# EAGLE board LedPanelV1 (EAGLE 6.5.0)
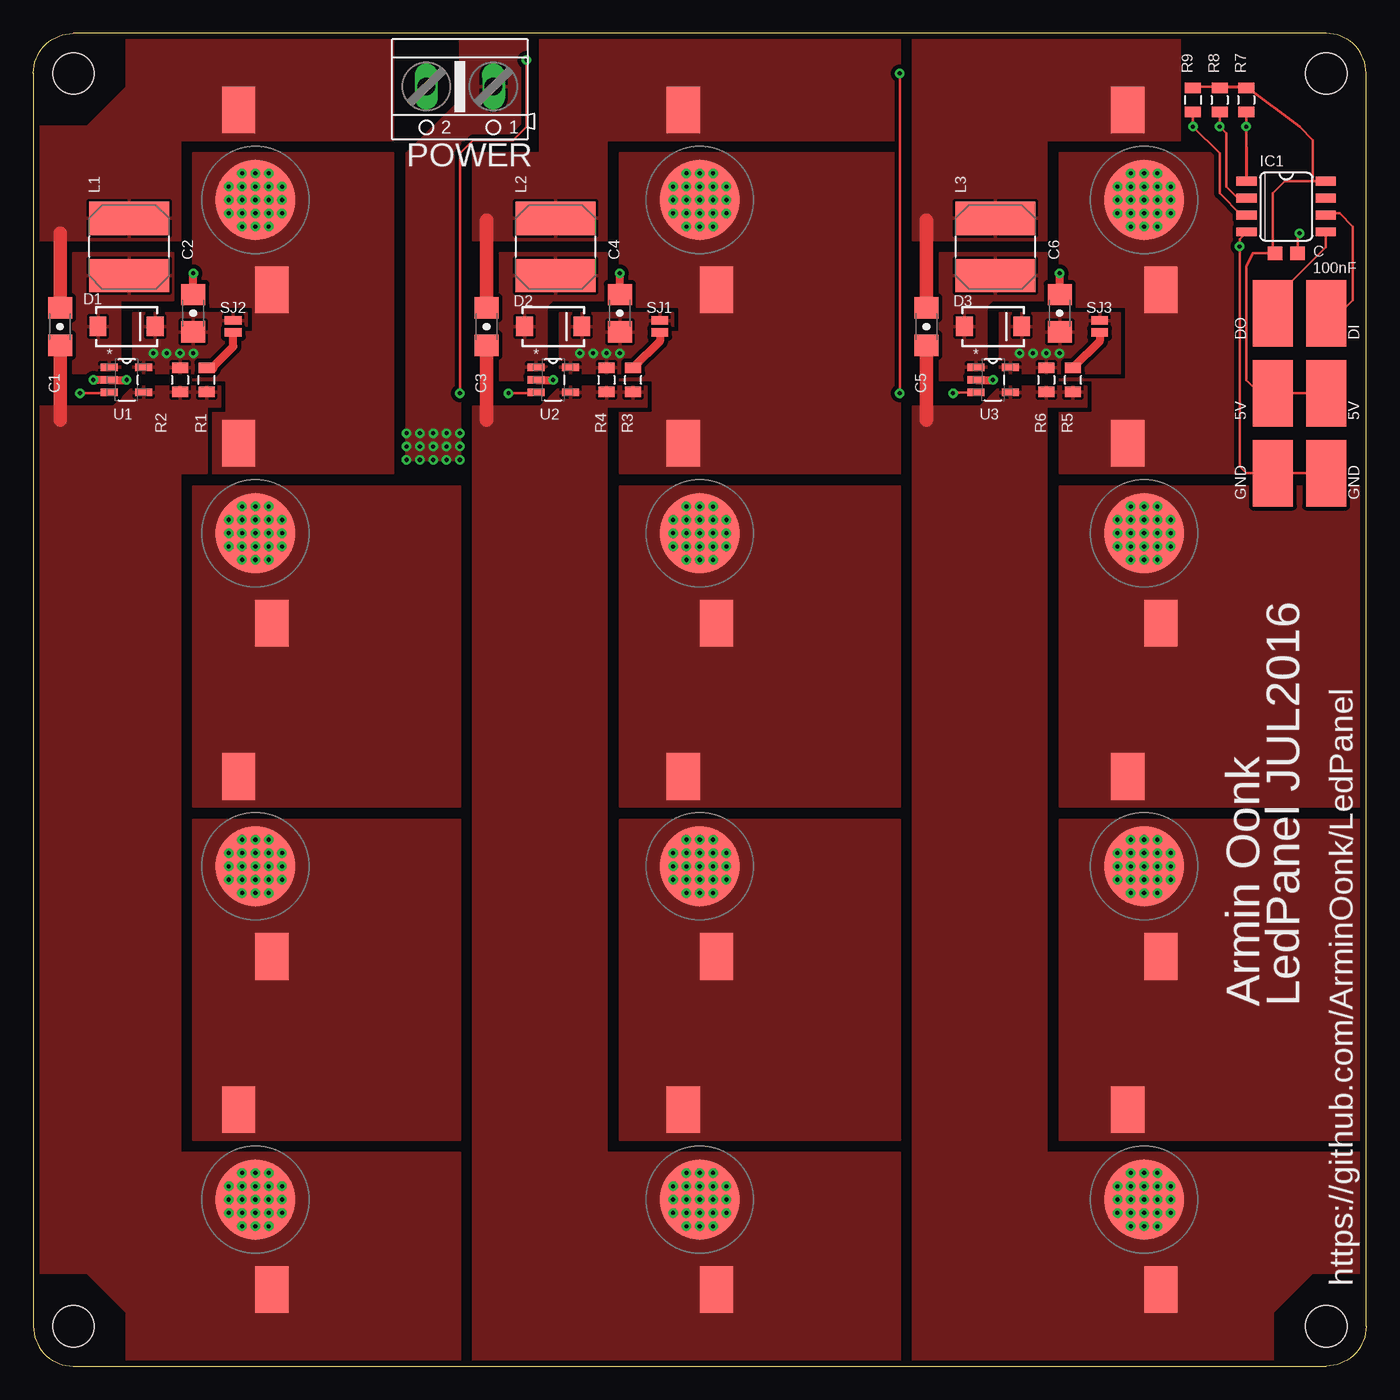
[diagram p0: board, top side]
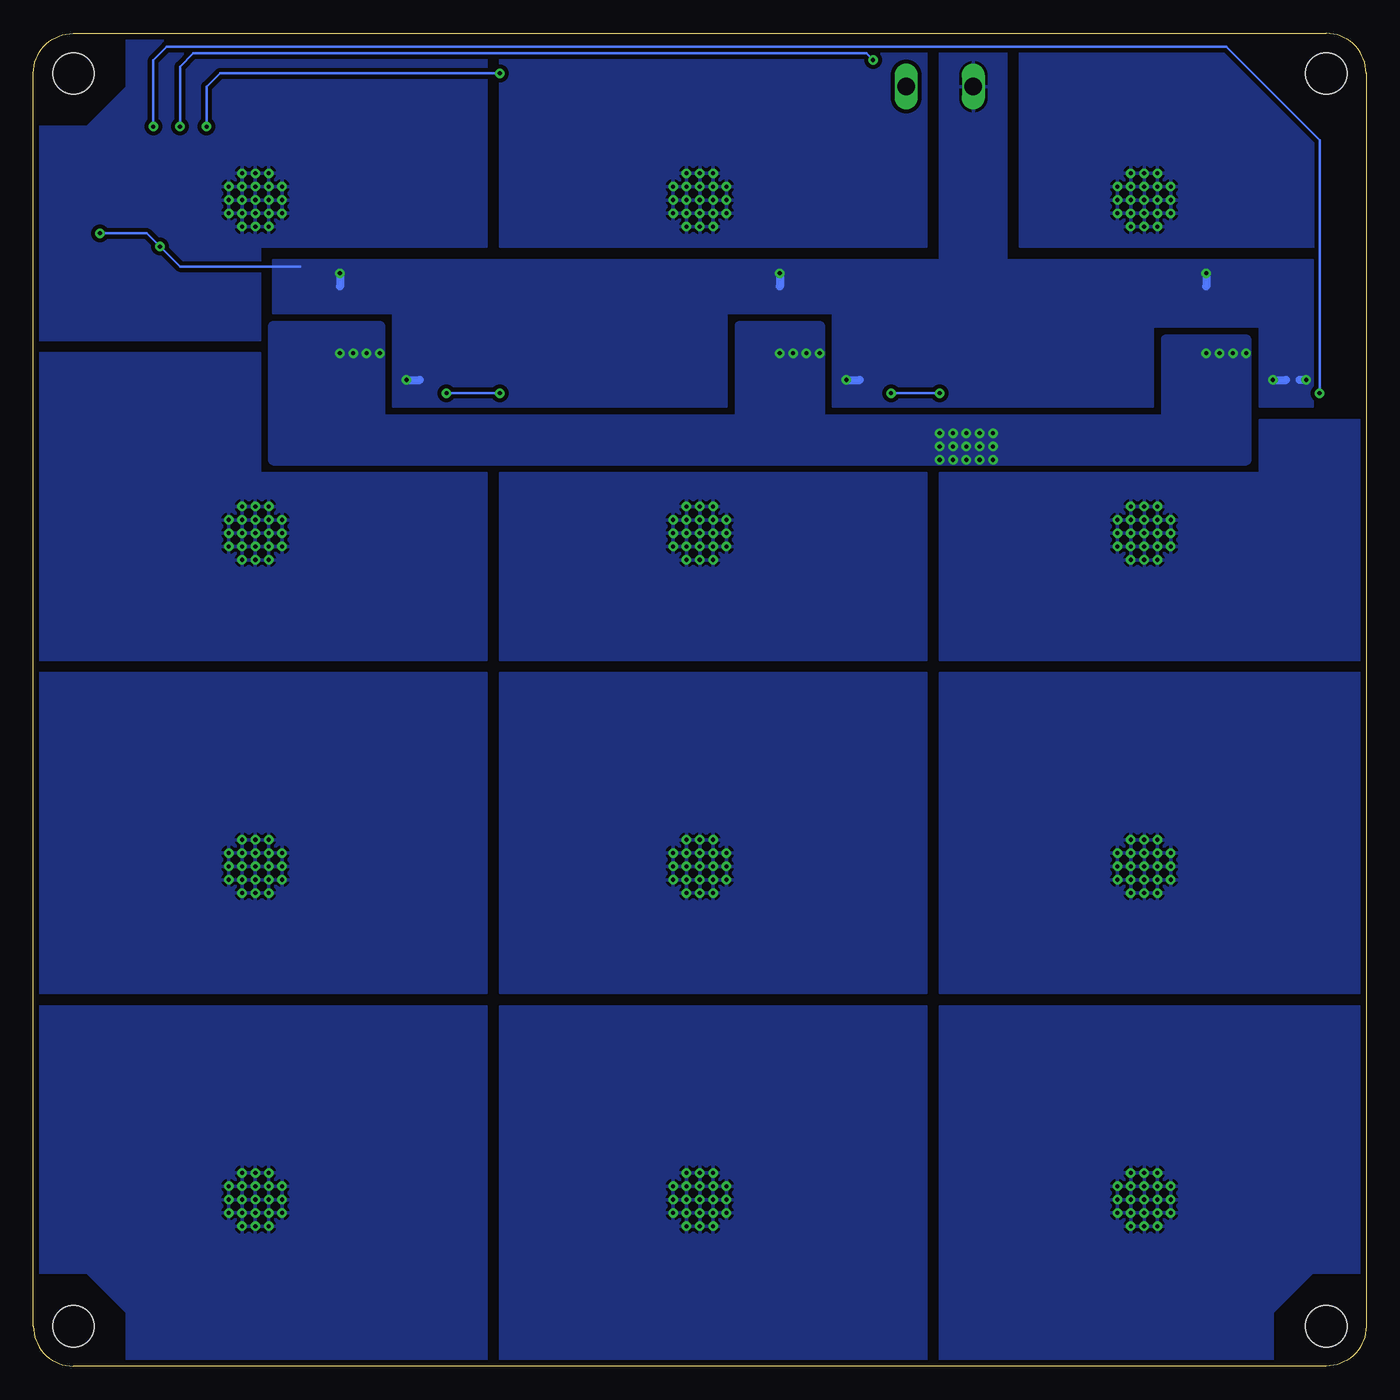
[diagram p1: board, bottom side, seen from below]

Size 100 x 100 mm. Coordinates in mm from the lower left corner, seen from the top.
Outline: 3,0 97,0 arc90 100,3 100,97 arc90 97,100 3,100 arc90 0,97 0,3 arc90 3,0
Copper layers (1*16): Top 0.018mm / dielectric 1.55mm / Bottom 0.018mm
Design rules "eC-PCB_proto-2-layer": minimum track width 0.15mm, minimum drill 0.25mm, track to track 0.15mm, track to pad 0.15mm, pad to pad 0.15mm, via to via 0.15mm, smd to smd 0.15mm, copper to edge 0.45mm, drill to drill 0.3mm, minimum pad ring 0.2mm, minimum via ring 0.2mm, stop-mask expansion 0.1mm, vias tented up to drill 0mil, thermal gap 0.2mm
Net classes: 0 default: width 0.152 mm, drill 0.305 mm, clearance 0.152 mm; 1 power: width 0.152 mm, drill 0.305 mm, clearance 0.152 mm
Holes 3.1 mm at 3,97 97,97 3,3 97,3

## Footprints (pad centres in the part's own frame; a part is rotated, then mirrored left to right if it is on the bottom)
SOLDER_PAD = smd 3 x 5: 1 0,0
1206-CAP = smd 1.6 x 1.8: 1 -1.4,0; 2 1.4,0
SMA-DIODE = smd 1.27 x 1.47: A -2.15,0; C 2.15,0
SO08-SKINNYPADS = smd 0.66 x 1.524: 1 -1.905,-2.973; 2 -0.635,-2.973; 3 0.635,-2.973; 4 1.905,-2.973; 5 1.905,2.973; 6 0.635,2.973; 7 -0.635,2.973; 8 -1.905,2.973 | smd 1 x 1.1: +5V 3.5,-0.85; GND 3.5,0.85
SRN6045 = smd 2.5 x 6: 1 -2.175,-0.175; 2 2.125,-0.175
AK500/2 = drill 1.321 long: 1 -2.515,0; 2 2.515,0
0805 = smd 0.8 x 1.2: 1 -0.9,0; 2 0.9,0
PAD-JUMPER-2-NO_NO_SILK = smd 0.635 x 1.27: 1 -0.45,0; 2 0.45,0
SOT95P280X130-5N = smd 1.27 x 0.559: 1 -1.295,0.94; 2 -1.295,0; 3 -1.295,-0.94; 4 1.295,-0.94; 5 1.295,0.94
LED_3W = smd 3.5 x 2.5: ANODE 6.75,1.25; CATHODE -6.75,-1.25 | drill 0.31: P$1 -2,-1; P$2 -1,-1; P$3 0,-1; P$4 1,-1; P$5 2,-1; P$6 2,0; P$7 1,0; P$8 0,0; P$9 -1,0; P$10 -2,0; P$11 -2,1; P$12 -1,1; P$13 0,1; P$14 1,1; P$15 2,1; P$16 -1,2; P$17 0,2; P$18 1,2; P$19 -1,-2; P$20 0,-2; P$21 1,-2 | smd 6 x 6: SLUG 0,0

## Placement (x,y rotation side)
5V  5V  [SOLDER_PAD]  97,73 0 top
C1  1uF  [1206-CAP]  2,78 90 top
C2  2.2uF  [1206-CAP]  12,79 90 top
C3  1uF  [1206-CAP]  34,78 90 top
C4  2.2uF  [1206-CAP]  44,79 90 top
C5  1uF  [1206-CAP]  67,78 90 top
C6  2.2uF  [1206-CAP]  77,79 90 top
D1  MBRA140  [SMA-DIODE]  7,78 0 top
D2  MBRA140  [SMA-DIODE]  39,78 0 top
D3  MBRA140  [SMA-DIODE]  72,78 0 top
DI  DI  [SOLDER_PAD]  97,79 0 top
DO  DO  [SOLDER_PAD]  93,79 0 top
IC1  WS2811-SOP8  [SO08-SKINNYPADS]  94,87 270 top
L1  33uH  [SRN6045]  7,84 90 top
L2  33uH  [SRN6045]  39,84 90 top
L3  33uH  [SRN6045]  72,84 90 top
POWER  [AK500/2]  32,96 180 top
R1  0.3R  [0805]  13,74 90 top
R2  0.3R  [0805]  11,74 270 top
R3  0.3R  [0805]  45,74 90 top
R4  0.3R  [0805]  43,74 270 top
R5  0.3R  [0805]  78,74 90 top
R6  0.3R  [0805]  76,74 270 top
R7  4.7k  [0805]  91,95 270 top
R8  4.7k  [0805]  89,95 270 top
R9  4.7k  [0805]  87,95 270 top
SJ1  NO Jumper  [PAD-JUMPER-2-NO_NO_SILK]  47,78 270 top
SJ2  NO Jumper  [PAD-JUMPER-2-NO_NO_SILK]  15,78 270 top
SJ3  NO Jumper  [PAD-JUMPER-2-NO_NO_SILK]  80,78 270 top
U1  AL8805W5-7  [SOT95P280X130-5N]  7,74 0 top
U2  AL8805W5-7  [SOT95P280X130-5N]  39,74 0 top
U3  AL8805W5-7  [SOT95P280X130-5N]  72,74 0 top
U$1  LED_3W  [LED_3W]  16.66,12.5 270 top
U$2  LED_3W  [LED_3W]  16.66,37.5 270 top
U$3  LED_3W  [LED_3W]  16.66,62.5 270 top
U$4  LED_3W  [LED_3W]  16.66,87.5 270 top
U$5  LED_3W  [LED_3W]  50,12.5 270 top
U$6  LED_3W  [LED_3W]  50,37.5 270 top
U$7  LED_3W  [LED_3W]  50,62.5 270 top
U$8  LED_3W  [LED_3W]  50,87.5 270 top
U$9  LED_3W  [LED_3W]  83.34,12.5 270 top
U$10  LED_3W  [LED_3W]  83.34,37.5 270 top
U$11  LED_3W  [LED_3W]  83.34,62.5 270 top
U$12  LED_3W  [LED_3W]  83.34,87.5 270 top
U$15  GND  [SOLDER_PAD]  97,67 0 top
U$16  5V  [SOLDER_PAD]  93,73 0 top
U$18  GND  [SOLDER_PAD]  93,67 0 top

## Library data of the parts
5V DI DO IC1 U$1-U$12 U$15 U$16 U$18 = LedPanel
C1-C6 = SparkFun-Capacitors
D1-D3 = SparkFun-DiscreteSemi; PROD_ID: DIO-08053
L1-L3 = SparkFun-Passives; PROD_ID: NDUC-11627
POWER = LedPanel; OC_FARNELL: unknown; OC_NEWARK: unknown
R1-R9 = SparkFun-Resistors; PROD_ID: RES-11622
SJ1-SJ3 = SparkFun-Passives
U1-U3 = LedPanel; MPN: AL8805W5-7; OC_FARNELL: 1904023; OC_NEWARK: 55T1754; PACKAGE: SOT-23-5; SUPPLIER: DIODES INC.

## Nets
5V: 5V.1 IC1.8 IC1.+5V R7.1 R8.1 R9.1 U$16.1
CTRL1: IC1.1 R7.2 U1.3
CTRL2: IC1.2 R8.2 U2.3
CTRL3: IC1.3 R9.2 U3.3
GND: C2.2 C4.2 C6.2 IC1.4 IC1.GND POWER.2 U1.2 U2.2 U3.2 U$15.1 U$18.1
LED1_OUT+: C1.1 R1.1 R2.2 U1.4 U$1.ANODE U$1.P$1 U$1.P$2 U$1.P$3 U$1.P$4 U$1.P$5 U$1.P$6 U$1.P$7 U$1.P$8 U$1.P$9 U$1.P$10 U$1.P$11 U$1.P$12 U$1.P$13 U$1.P$14 U$1.P$15 U$1.P$16 U$1.P$17 U$1.P$18 U$1.P$19 U$1.P$20 U$1.P$21 U$1.SLUG
LED1_OUT- [power]: C1.2 L1.2 U$4.CATHODE
LED2_OUT+: C3.1 R3.1 R4.2 U2.4 U$5.ANODE U$5.P$1 U$5.P$2 U$5.P$3 U$5.P$4 U$5.P$5 U$5.P$6 U$5.P$7 U$5.P$8 U$5.P$9 U$5.P$10 U$5.P$11 U$5.P$12 U$5.P$13 U$5.P$14 U$5.P$15 U$5.P$16 U$5.P$17 U$5.P$18 U$5.P$19 U$5.P$20 U$5.P$21 U$5.SLUG
LED2_OUT- [power]: C3.2 L2.2 U$8.CATHODE
LED3_OUT+: C5.1 R5.1 R6.2 U3.4 U$9.ANODE U$9.P$1 U$9.P$2 U$9.P$3 U$9.P$4 U$9.P$5 U$9.P$6 U$9.P$7 U$9.P$8 U$9.P$9 U$9.P$10 U$9.P$11 U$9.P$12 U$9.P$13 U$9.P$14 U$9.P$15 U$9.P$16 U$9.P$17 U$9.P$18 U$9.P$19 U$9.P$20 U$9.P$21 U$9.SLUG
LED3_OUT- [power]: C5.2 L3.2 U$12.CATHODE
N$1: U$3.CATHODE U$4.ANODE U$4.P$1 U$4.P$2 U$4.P$3 U$4.P$4 U$4.P$5 U$4.P$6 U$4.P$7 U$4.P$8 U$4.P$9 U$4.P$10 U$4.P$11 U$4.P$12 U$4.P$13 U$4.P$14 U$4.P$15 U$4.P$16 U$4.P$17 U$4.P$18 U$4.P$19 U$4.P$20 U$4.P$21 U$4.SLUG
N$2: U$2.CATHODE U$3.ANODE U$3.P$1 U$3.P$2 U$3.P$3 U$3.P$4 U$3.P$5 U$3.P$6 U$3.P$7 U$3.P$8 U$3.P$9 U$3.P$10 U$3.P$11 U$3.P$12 U$3.P$13 U$3.P$14 U$3.P$15 U$3.P$16 U$3.P$17 U$3.P$18 U$3.P$19 U$3.P$20 U$3.P$21 U$3.SLUG
N$3: U$1.CATHODE U$2.ANODE U$2.P$1 U$2.P$2 U$2.P$3 U$2.P$4 U$2.P$5 U$2.P$6 U$2.P$7 U$2.P$8 U$2.P$9 U$2.P$10 U$2.P$11 U$2.P$12 U$2.P$13 U$2.P$14 U$2.P$15 U$2.P$16 U$2.P$17 U$2.P$18 U$2.P$19 U$2.P$20 U$2.P$21 U$2.SLUG
N$4: U$7.CATHODE U$8.ANODE U$8.P$1 U$8.P$2 U$8.P$3 U$8.P$4 U$8.P$5 U$8.P$6 U$8.P$7 U$8.P$8 U$8.P$9 U$8.P$10 U$8.P$11 U$8.P$12 U$8.P$13 U$8.P$14 U$8.P$15 U$8.P$16 U$8.P$17 U$8.P$18 U$8.P$19 U$8.P$20 U$8.P$21 U$8.SLUG
N$5: U$6.CATHODE U$7.ANODE U$7.P$1 U$7.P$2 U$7.P$3 U$7.P$4 U$7.P$5 U$7.P$6 U$7.P$7 U$7.P$8 U$7.P$9 U$7.P$10 U$7.P$11 U$7.P$12 U$7.P$13 U$7.P$14 U$7.P$15 U$7.P$16 U$7.P$17 U$7.P$18 U$7.P$19 U$7.P$20 U$7.P$21 U$7.SLUG
N$6: R1.2 SJ2.2
N$7: U$5.CATHODE U$6.ANODE U$6.P$1 U$6.P$2 U$6.P$3 U$6.P$4 U$6.P$5 U$6.P$6 U$6.P$7 U$6.P$8 U$6.P$9 U$6.P$10 U$6.P$11 U$6.P$12 U$6.P$13 U$6.P$14 U$6.P$15 U$6.P$16 U$6.P$17 U$6.P$18 U$6.P$19 U$6.P$20 U$6.P$21 U$6.SLUG
N$8: R3.2 SJ1.2
N$9: U$11.CATHODE U$12.ANODE U$12.P$1 U$12.P$2 U$12.P$3 U$12.P$4 U$12.P$5 U$12.P$6 U$12.P$7 U$12.P$8 U$12.P$9 U$12.P$10 U$12.P$11 U$12.P$12 U$12.P$13 U$12.P$14 U$12.P$15 U$12.P$16 U$12.P$17 U$12.P$18 U$12.P$19 U$12.P$20 U$12.P$21 U$12.SLUG
N$10: U$10.CATHODE U$11.ANODE U$11.P$1 U$11.P$2 U$11.P$3 U$11.P$4 U$11.P$5 U$11.P$6 U$11.P$7 U$11.P$8 U$11.P$9 U$11.P$10 U$11.P$11 U$11.P$12 U$11.P$13 U$11.P$14 U$11.P$15 U$11.P$16 U$11.P$17 U$11.P$18 U$11.P$19 U$11.P$20 U$11.P$21 U$11.SLUG
N$11: U$9.CATHODE U$10.ANODE U$10.P$1 U$10.P$2 U$10.P$3 U$10.P$4 U$10.P$5 U$10.P$6 U$10.P$7 U$10.P$8 U$10.P$9 U$10.P$10 U$10.P$11 U$10.P$12 U$10.P$13 U$10.P$14 U$10.P$15 U$10.P$16 U$10.P$17 U$10.P$18 U$10.P$19 U$10.P$20 U$10.P$21 U$10.SLUG
N$12: R5.2 SJ3.2
N$13: DI.1 IC1.6
N$14: DO.1 IC1.5
SW1: D1.A L1.1 U1.1
SW2: D2.A L2.1 U2.1
SW3: D3.A L3.1 U3.1
VCC: C2.1 C4.1 C6.1 D1.C D2.C D3.C POWER.1 R2.1 R4.1 R6.1 SJ1.1 SJ2.1 SJ3.1 U1.5 U2.5 U3.5

## Tracks (layer width: path | path; a pad name or v marks a point on that pad's centre or on a via)
5V
  Top 0.203: IC1.8 96,88.91 | 96,88.91 93.91,88.91 93,88 93,83.65 IC1.+5V 91.5,83.5 91,82.5 91,74 92,73 5V.1 U$16.1 | 91,96 95,93 96,92 96,88.91 | R8.1 91,96 | 91,96 89.1,96 R7.1 89,96 87.1,96 R9.1
CTRL1  (via drill 0.31)
  Top 0.203: U1.3 5.64,73 v3.5,73 | v91,93 91,89 91.03,88.97 IC1.1 91.03,89.97 v91,93 | v91,93 R7.2
  Bottom 0.203: v91,93 91,98 90,99 10.5,99 3.5,92 v3.5,73
CTRL2  (via drill 0.31)
  Top 0.203: IC1.2 90.36,87.64 89.5,88.5 89.5,92.5 v89,93 R8.2 | v37,98 37,93 36,92 33,92 32,91 v32,73 | v35.64,73 38,73 U2.3
  Bottom 0.203: v89,93 89,97.5 88,98.5 37.5,98.5 v37,98 | v32,73 v35.64,73
CTRL3  (via drill 0.31)
  Top 0.203: IC1.3 90.64,86.36 89,88 89,91 v87,93 R9.2 | v65,97 v65,73 | U3.3 69.06,73.06 v69,73
  Bottom 0.203: v87,93 87,96 86,97 v65,97 | v65,73 v69,73
GND  (via drill 0.31)
  Top 0.203: U$15.1 U$18.1 91,67 90.5,67.5 v90.5,84 90.5,84.57 IC1.4 | IC1.GND 94.85,84.85 v95,85
  Top 0.61: v4.5,74 U1.2 v7,74 | C2.2 v12,82 | U2.2 v39,74 | C4.2 v44,82 | U3.2 v72,74 | C6.2 v77,82
  Bottom 0.203: v95,85 91.5,85 v90.5,84 89,82.5 80,82.5
  Bottom 0.61: v4.5,74 5,74 | v7,74 6,74 | v12,82 12,81 | v39,74 38,74 | v44,82 44,81 | v72,74 71,74 | v77,82 77,81
  pour Bottom (isolate 0.305): 4,83 27,83 27,100 32,100 32,83 82,83 82,79 73,79 73,72 48,72 48,79 40,79 40,72 16,72 16,78 8,78 8,72 4,72
LED1_OUT+
  Top 1.016: C1.1 2,71
  pour Top (isolate 0.305, rank 2): 0,72 6,72 7.5,73.5 14,73.5 14,72 13,72 13,67 11,67 11,16 32,16 32,0 7,0 7,4 4,7 0,7
  pour Bottom (isolate 0.305): 32,27 0,27 0,7 4,7 7,4 7,0 32,0
LED1_OUT-
  Top 1.016: C1.2 2,85
  pour Top (isolate 0.305, rank 2): 0,84.5 11,84.5 11,92 27,92 27,100 7,100 7,96 4,93 0,93
LED2_OUT+
  Top 1.016: C3.1 34,71
  pour Top (isolate 0.305): 33,0 65,0 65,16 43,16 43,72 46,72 46,73.5 39.5,73.5 38,72 33,72
  pour Bottom (isolate 0.305): 33,27 65,27 65,0 33,0
LED2_OUT-
  Top 1.016: C3.2 34,86
  pour Top (isolate 0.305): 33,84.5 43,84.5 43,92 65,92 65,100 38,100 38,91 33,91
LED3_OUT+
  Top 1.016: C5.1 67,71
  pour Top (isolate 0.305): 66,0 93,0 93,4 96,7 100,7 100,16 76,16 76,72 79,72 79,73.5 72.5,73.5 71,72 66,72
  pour Bottom (isolate 0.305): 66,0 93,0 93,4 96,7 100,7 100,27 66,27 66,1
LED3_OUT-
  Top 1.016: C5.2 67,86
  pour Top (isolate 0.305): 86,92 86,100 66,100 66,84.5 76,84.5 76,92
N$1
  pour Top (isolate 0.305, rank 3): 12,67 27,67 27,91 12,91
  pour Bottom (isolate 0.305): 26,84 26,100 7,100 7,96 4,93 1,93 0,93 0,84
N$2
  pour Top (isolate 0.305): 12,42 32,42 32,66 12,66
  pour Bottom (isolate 0.305): 32,53 32,67 8,67 8,71 0,71 0,53
N$3
  pour Top (isolate 0.305): 12,41 32,41 32,17 12,17
  pour Bottom (isolate 0.305): 0,28 32,28 32,52 0,52
N$4
  pour Top (isolate 0.305, rank 3): 44,67 65,67 65,91 44,91
  pour Bottom (isolate 0.305): 65,84 65,100 33,100 33,84
N$5
  pour Top (isolate 0.305): 44,42 65,42 65,66 44,66
  pour Bottom (isolate 0.305): 33,53 65,53 65,67 33,67
N$6
  Top 0.61: 13.4,74.9 15,76.5 SJ2.2
  Top 0.813: R1.2 13.4,74.9
N$7
  pour Top (isolate 0.305): 44,17 65,17 65,41 44,41
  pour Bottom (isolate 0.305): 33,28 65,28 65,52 33,52
N$8
  Top 0.61: SJ1.2 47,76.9 R3.2
N$9
  pour Top (isolate 0.305, rank 3): 77,67 93,67 93,91 77,91
  pour Bottom (isolate 0.305): 83,77 100,77 100,93 96,93 93,96 93,100 66,100 66,84 83,84
N$10
  pour Top (isolate 0.305): 77,42 100,42 100,66 77,66
  pour Bottom (isolate 0.305): 66,53 100,53 100,76 83,76 83,67 66,67
N$11
  pour Top (isolate 0.305): 77,17 100,17 100,41 77,41
  pour Bottom (isolate 0.305): 66,28 100,28 100,52 66,52
N$12
  Top 0.61: SJ3.2 80,76.9 R5.2
N$13
  Top 0.203: DI.1 98,79 99,80 99,85.5 98,86.5 97.11,86.5 IC1.6
N$14
  Top 0.203: IC1.5 96.97,83.97 93,80 DO.1 93,78.5
SW1
  pour Top (isolate 0.305): 3,74.5 6.5,74.5 6.5,80 10.5,80 10.5,83.5 3,83.5
SW2
  pour Top (isolate 0.305): 35,74 37.5,74 38.5,75 38.5,79.5 39,80 43,80 43,83.5 35,83.5
SW3
  pour Top (isolate 0.305): 68,83.5 68,74 71.5,74 71.5,79.5 72,80 76,80 76,83.5
VCC  (via drill 0.31)
  other vias: 29,70 30,70 31,70 31,69 30,69 29,69 29,68 30,68 31,68 32,70 32,69 32,68 28,69 28,68 28,70 75,76 76,76 77,76 74,76 41,76 42,76 43,76 44,76 9,76 10,76 11,76 12,76
  pour Top (isolate 0.305): 16,74.5 7.5,74.5 7.5,79 16,79
  pour Top (isolate 0.305): 39.5,79 39.5,74.5 48,74.5 48,79
  pour Top (isolate 0.305): 81.5,79 72.5,79 72.5,74.5 81.5,74.5
  pour Top (isolate 0.305): 32,100 37,100 37,92 32,92 32,68 28,68 28,91 32,95
  pour Bottom (isolate 0.305): 82,68 9,68 9,77 15,77 15,71 41,71 41,78 47,78 47,71 74,71 74,78 82,78

## Text on the board
tPlace: C / 100nF | Armin Oonk | LedPanel JUL2016 | https://github.com/ArminOonk/LedPanel